# Altium PCB CATZILLA.PcbDoc (part 3 of 3)
Units mm, origin at the board's own origin, x right, y up, seen from the top; angles counter-clockwise.
Board outline 100 x 100 mm, 2 copper layers (Top Layer, Bottom Layer), stack 1.57 mm thick; 150 components, 108 nets, 585 pads, 1555 vias.
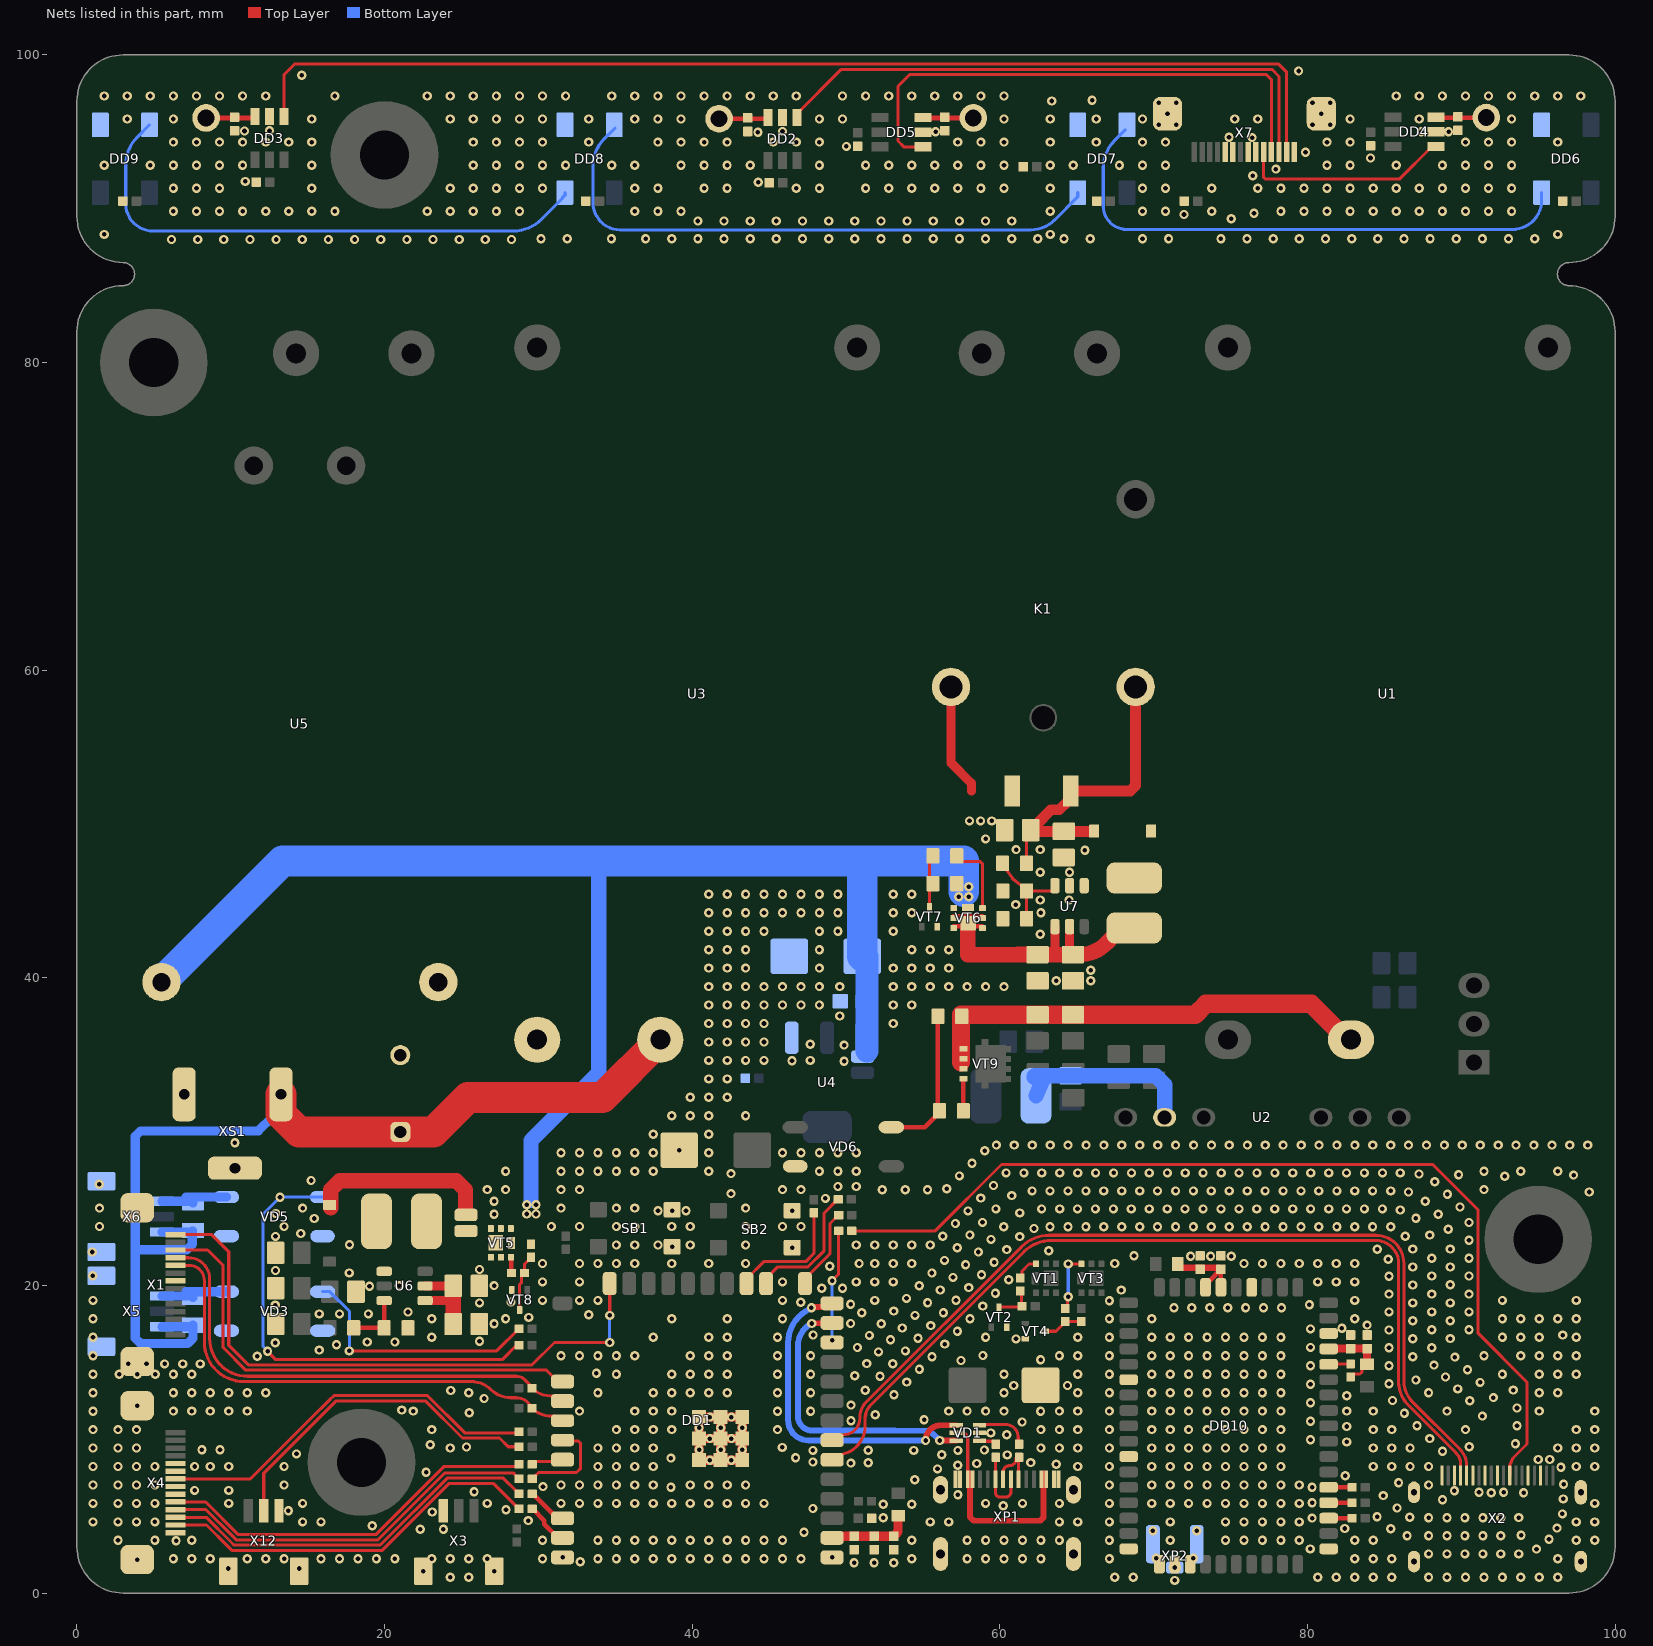
[diagram p2: the nets of this part, all layers, seen from the top]

## Via types
v1: diameter 0.6, hole 0.3, Top Layer to Bottom Layer, tented both sides, 1554 vias
v2: diameter 0.7/0.8 (per signal layer), hole 0.3, Top Layer to Bottom Layer, tented both sides, 1 vias

## Nets (pads, with @x,y where several pads share a name; then routed paths per layer and width w, separated by ;. In a path a pad name is that pad's centre, name@x,y a point inside that pad or via, vN(x,y) a via of type N, cw(c..) or ccw(c..) an arc to the next point about the centre after c; other vN are vias at no path point) (continued)
GND_ISO: C1.1 C2.1 C3.1 C4.1 C19.1 C20.1 C21.2 C22.1 C27.2 C28.2 C29.2 C30.2 C31.2 C32.2 C33.2 C34.2 C35.2 C36.2 C37.2 C38.2 C39.2 C40.2 C41.2 DD1.1 DD1.40 DD1.TP DD10.1 DD10.15 DD10.21 DD10.33 DD10.38 DD10.44 DD10.45 DD10.47 K1.1 R34.1 R35.1 R36.1 SB1.2 SB2.2 U4.1 U5.3 U7.2 VD1.2 VD3.2 VD5.2 VD6.2 VD9.2 VT2.2 VT4.2 VT7.2 VT8.2 X1.7 X1.15 X2.3 X2.5 X2.10 X2.12 X2.14 X2.17 X2.19 X2.20 X3.1 X3.MP X4.5 X4.6 X4.8 X4.9 X4.14 X4.15 X5.MP X6.MP X12.3 X12.MP XP1.1 XP1.12 XP1.MS XP2.2 XP2.3 | length 26.2
  Top Layer w0.6: v1(41.85,9.323) DD1.TP@41.85,10.043 ; v1(42.55,8.643) DD1.TP@40.45,8.643 DD1.TP@40.45,10.043 ; v1(42.55,11.443) DD1.TP@43.25,11.443 ; K1.1@56.825,58.908 56.825,53.975 58.15,52.65 58.15,52.15 ; DD1.TP@40.45,10.043 DD1.TP@40.45,11.443 DD1.TP@41.85,11.443 ; DD1.TP@40.45,10.043 DD1.TP@41.85,10.043 ; DD1.TP@41.85,10.043 DD1.TP@41.85,8.643 DD1.TP@43.25,8.643 DD1.TP@43.25,10.043 ; DD1.TP@41.85,10.043 DD1.TP@43.25,10.043 ; DD1.TP@41.85,10.043 DD1.TP@41.85,11.443 ; DD1.TP@41.85,11.443 DD1.TP@43.25,11.443 ; DD1.TP@43.25,10.043 DD1.TP@43.25,11.443
  other v1: 71.375,0.825 24.273,1.03 25.473,1.03 67.473,1.03 68.673,1.03 80.673,1.03 81.873,1.03 83.073,1.03 84.273,1.03 85.473,1.03 87.873,1.03 89.073,1.03 90.273,1.03 91.473,1.03 92.673,1.03 93.873,1.03 95.073,1.03 96.273,1.03 22.525,1.425 27.125,1.425 9.85,1.6 14.45,1.6 50.525,1.975 51.825,1.975 53.1,1.975 32.725,2.044 3.925,2.178 6.273,2.23 7.473,2.23 8.673,2.23 11.073,2.23 12.273,2.23 13.473,2.23 15.873,2.23 17.073,2.23 18.273,2.23 19.473,2.23 20.673,2.23 23.073,2.23 24.273,2.23 25.473,2.23 26.673,2.23 30.273,2.23 33.873,2.23 35.073,2.23 36.273,2.23 37.473,2.23 38.673,2.23 39.873,2.23 41.073,2.23 42.273,2.23 43.473,2.23 44.673,2.23 45.873,2.23 47.073,2.23 54.273,2.23 57.873,2.23 59.073,2.23 60.273,2.23 61.473,2.23 62.673,2.23 67.125,2.231 83.073,2.23 84.273,2.23 85.473,2.23 96.273,2.23 70.167,2.272 72.585,2.272 31.575,2.323 49.1,2.323 87.873,2.55 89.073,2.55 90.234,2.55 91.407,2.55 92.568,2.55 93.729,2.55 94.888,2.86 80.175,2.875 6.45,3.4 2.673,3.43 5.073,3.43 7.473,3.43 30.273,3.43 33.873,3.43 35.073,3.43 36.273,3.43 37.473,3.43 38.673,3.43 39.873,3.43 41.073,3.43 42.273,3.43 43.473,3.43 44.673,3.43 45.873,3.43 54.273,3.43 57.873,3.43 59.073,3.43 60.273,3.43 61.473,3.43 62.673,3.43 63.873,3.43 67.125,3.431 71.073,3.43 74.673,3.43 75.873,3.43 77.073,3.43 78.273,3.43 79.473,3.43 83.073,3.43 84.273,3.43 97.473,3.43 98.673,3.43 95.7,3.5 86.478,3.735 87.873,3.731 89.073,3.731 90.234,3.731 91.407,3.731 92.568,3.731 93.888,3.757 47.273,3.952 69.95,4.05 72.8,4.05 22.32,4.15 23.825,4.15 85.415,4.178 82.425,4.2 96.225,4.225 19.2,4.375 1.05,4.63 2.673,4.63 3.873,4.63 5.073,4.63 14.673,4.63 15.873,4.63 55.473,4.63 56.673,4.63 63.873,4.63 65.073,4.63 67.125,4.631 71.073,4.63 74.673,4.63 75.873,4.63 77.073,4.63 78.273,4.63 79.473,4.63 97.473,4.63 98.673,4.63 29.35,4.715 80.3,4.875 52.425,4.9 87.873,4.904 89.073,4.904 90.234,4.904 91.407,4.904 92.568,4.904 86.65,4.925 93.74,4.911 84.525,4.965 96.575,5.15 23.105,5.27 13.75,5.35 27.9,5.425 47.85,5.5 85.829,5.53 60.225,5.675 52.425,5.775 54.275,5.775 1.05,5.83 2.673,5.83 3.873,5.83 5.073,5.83 9.873,5.83 14.673,5.83 26.673,5.83 31.473,5.83 32.673,5.83 33.873,5.83 35.073,5.83 36.273,5.83 37.473,5.83 38.673,5.83 39.873,5.83 41.073,5.83 42.273,5.83 43.473,5.83 44.673,5.83 59.073,5.83 61.473,5.83 63.873,5.83 67.125,5.831 69.873,5.83 71.073,5.83 72.273,5.83 73.473,5.83 74.673,5.83 75.873,5.83 77.073,5.83 78.273,5.83 79.473,5.83 98.673,5.83 80.3,5.875 88.775,6.075 96.625,6.125 84.932,6.338 57.275,6.4 91.95,6.525 94.05,6.525 91.15,6.55 92.75,6.55 25.821,6.582 89.55,6.65 7.65,6.675 9.873,6.675 38.618,6.885 80.3,6.875 30.3,6.925 1.05,7.03 2.673,7.03 3.873,7.03 5.073,7.03 13.473,7.03 31.473,7.03 32.673,7.03 33.873,7.03 35.073,7.03 36.273,7.03 37.473,7.03 39.873,7.03 41.073,7.03 42.273,7.03 43.473,7.03 67.125,7.031 69.873,7.03 71.073,7.03 72.273,7.03 73.473,7.03 74.673,7.03 75.873,7.03 77.073,7.03 78.273,7.03 79.473,7.03 87.873,7.03 96.65,7.075 85.925,7.175 54.475,7.375 82.45,7.625 22.7,7.85 55.95,8.075 96.475,8.175 1.05,8.23 2.673,8.23 3.873,8.23 5.073,8.23 7.65,8.23 8.673,8.23 9.873,8.23 13.473,8.23 33.873,8.23 35.073,8.23 36.273,8.23 37.473,8.23 65.073,8.23 67.125,8.231 69.873,8.23 71.073,8.23 72.273,8.23 73.473,8.23 74.673,8.23 75.873,8.23 77.073,8.23 78.273,8.23 84.273,8.23 85.473,8.23 86.673,8.23 87.873,8.23 97.473,8.23 98.673,8.23 57.262,8.32 63.675,8.375 58.5,8.425 50.321,8.454 51.45,8.475 62.015,8.485 47.85,8.525 41.15,8.643 95,8.683 95.751,8.683 38.619,8.775 46.725,8.8 60.488,8.985 56.225,9 14.275,9.05 88.775,9.225 47.85,9.275 54.4,9.275 57.275,9.275 51.45,9.282 59,9.3 8.125,9.325 9.3,9.325 40.45,9.323 43.25,9.323 1.05,9.43 2.673,9.43 3.873,9.43 24.273,9.43 33.873,9.43 35.073,9.43 36.273,9.43 37.473,9.43 62.673,9.43 63.873,9.43 65.073,9.43 67.125,9.431 69.873,9.43 71.073,9.43 72.273,9.43 73.473,9.43 74.673,9.43 75.873,9.43 77.073,9.43 78.273,9.43 84.273,9.43 85.473,9.43 86.673,9.43 96.273,9.43 97.473,9.43 98.673,9.43 45.861,9.471 25.325,9.5 90.524,9.512 22.975,9.65 93.519,9.715 82.55,9.831 80.2,9.975 41.15,10.043 42.55,10.043 87.954,10.046 60.452,10.289 59.414,10.416 1.05,10.63 2.673,10.63 3.873,10.63 23.073,10.63 35.073,10.63 36.273,10.63 37.473,10.63 38.673,10.63 45.55,10.63 62.673,10.63 63.873,10.63 65.073,10.63 67.125,10.631 69.873,10.63 71.073,10.63 72.273,10.63 73.473,10.63 74.673,10.63 75.873,10.63 77.073,10.63 78.273,10.63 84.273,10.63 85.473,10.63 90.273,10.63 97.473,10.63 98.673,10.63 40.45,10.748 41.85,10.748 43.25,10.748 82.55,10.831 93.625,10.875 87.124,10.876 61.45,11.125 80.2,11.175 50.325,11.2 55.075,11.275 41.15,11.443 91.371,11.507 51.9,11.6 86.303,11.697 25.5,11.725 1.05,11.83 6.273,11.83 7.473,11.83 8.673,11.83 9.873,11.83 11.073,11.83 21.873,11.83 32.673,11.83 36.273,11.83 37.473,11.83 38.673,11.83 45.55,11.83 47.7,11.83 56.673,11.83 57.873,11.83 59.073,11.83 60.273,11.83 62.65,11.825 63.873,11.83 65.073,11.83 67.125,11.831 69.873,11.83 71.073,11.83 72.273,11.83 73.473,11.83 74.673,11.83 75.873,11.83 77.073,11.83 78.273,11.83 82.55,11.831 84.273,11.83 89.073,11.83 95.073,11.83 98.673,11.83 21.125,11.9 93.625,12.036 3.925,12.178 50.325,12.223 80.2,12.375 90.55,12.5 85.525,12.525 26.475,12.65 92.085,12.709 82.55,12.831 53.121,12.896 1.05,13.03 6.273,13.03 7.473,13.03 8.673,13.03 9.873,13.03 11.073,13.03 12.273,13.03 25.473,13.03 33.873,13.03 37.473,13.03 38.673,13.03 39.873,13.03 41.073,13.03 42.273,13.03 45.55,13.03 47.7,13.03 60.273,13.03 65.073,13.03 67.125,13.03 69.873,13.03 71.073,13.03 72.273,13.03 73.473,13.03 74.673,13.03 75.873,13.03 77.073,13.03 78.273,13.03 87.873,13.03 95.073,13.03 96.273,13.03 24.3,13.175 51.257,13.188 93.375,13.2 89.775,13.275 60.9,13.5 64.4,13.5 80.2,13.575 85.3,13.611 53.942,13.717 91.225,13.7 87.052,13.851 88.975,14.05 52.211,14.097 50.57,14.132 1.05,14.23 2.748,14.23 3.923,14.23 5.098,14.23 6.273,14.23 7.473,14.23 35.073,14.23 38.673,14.23 39.873,14.23 41.073,14.23 42.273,14.23 45.55,14.23 47.7,14.23 60.273,14.23 65.073,14.23 67.125,14.23 69.873,14.23 71.073,14.23 72.273,14.23 73.473,14.23 74.673,14.23 75.873,14.23 77.073,14.23 78.273,14.23 92.673,14.23 95.073,14.23 96.273,14.23 97.473,14.23 33.775,14.3 90.404,14.521 54.772,14.547 80.2,14.774 85.3,14.784 88.225,14.825 3.35,14.9 4.525,14.9 5.7,14.9 6.875,14.9 8.025,14.9 51.347,14.92 53.033,14.918 57.475,15.125 62.65,15.175 89.583,15.342 55.593,15.368 86.85,15.373 11.725,15.4 1.05,15.43 31.473,15.43 32.673,15.43 33.873,15.43 35.073,15.43 36.273,15.43 39.873,15.43 41.073,15.43 42.273,15.43 45.55,15.43 47.7,15.43 63.873,15.43 65.073,15.43 67.125,15.43 69.873,15.43 71.073,15.43 72.273,15.43 73.473,15.43 74.673,15.43 75.873,15.43 77.073,15.43 78.273,15.43 91.473,15.43 93.873,15.43 95.073,15.43 96.273,15.43 97.473,15.43 58.9,15.45 52.116,15.682 53.862,15.747 15.75,15.8 85.3,15.945 88.075,15.945 50.743,15.964 80.2,15.974 16.875,16.15 56.414,16.189 12.9,16.275 18.875,16.325 20.675,16.325 26.175,16.381 52.893,16.47 61.05,16.525 86.85,16.534 89.275,16.546 54.683,16.568 1.05,16.63 23.073,16.63 37.473,16.63 41.073,16.63 42.273,16.63 45.55,16.63 59.073,16.63 65.073,16.63 67.125,16.63 69.873,16.63 71.073,16.63 72.273,16.63 73.473,16.63 74.673,16.63 75.873,16.63 77.073,16.63 78.273,16.63 92.673,16.63 93.873,16.63 95.073,16.63 97.473,16.63 51.52,16.752 47.863,16.781 96.6,16.775 57.243,17.018 85.3,17.106 88.075,17.118 90.5,17.118 80.2,17.174 82.237,17.221 53.663,17.233 55.504,17.389 83.875,17.425 27.125,17.506 50.3,17.525 52.29,17.515 86.85,17.707 89.275,17.708 1.05,17.83 23.073,17.83 27.873,17.83 38.673,17.83 42.273,17.83 45.873,17.83 67.125,17.83 69.873,17.83 83.073,17.83 92.673,17.83 93.873,17.83 95.073,17.83 96.273,17.83 97.473,17.83 58.064,17.839 29.375,17.925 54.484,18.054 33.275,18.1 15.75,18.15 17.075,18.15 18.95,18.15 51.025,18.225 56.334,18.219 21.527,18.275 85.3,18.279 88.075,18.28 90.5,18.28 53.111,18.336 71.321,18.55 72.482,18.55 73.643,18.55 74.816,18.55 75.978,18.55 77.139,18.55 78.312,18.55 58.885,18.66 12.9,18.725 80.125,18.75 50.3,18.775 26.175,18.865 55.305,18.875 86.85,18.868 89.275,18.869 28.225,18.925 47.065,18.915 67.125,19 1.05,19.03 30.273,19.03 32.673,19.03 33.873,19.03 45.873,19.03 51.873,19.03 57.155,19.04 83.073,19.03 92.673,19.03 97.473,19.03 53.932,19.157 85.3,19.44 88.075,19.441 90.5,19.441 59.715,19.49 56.134,19.704 67.9,19.7 48.425,19.825 49.775,19.825 57.976,19.861 19.025,19.95 20.95,19.975 27.125,19.99 54.761,19.986 86.85,20.03 89.275,20.042 30.273,20.23 32.673,20.23 45.873,20.23 50.673,20.23 51.873,20.23 53.073,20.23 80.673,20.23 81.873,20.23 83.073,20.23 60.575,20.375 56.955,20.525 85.3,20.602 1.025,20.625 88.075,20.614 90.5,20.614 58.805,20.691 17.7,20.815 55.582,20.807 12.909,20.975 26.175,21.04 86.85,21.203 89.275,21.203 48.95,21.25 57.776,21.346 30.273,21.43 32.673,21.43 33.873,21.43 35.073,21.43 36.273,21.43 38.673,21.43 41.075,21.43 43.473,21.43 50.85,21.43 51.873,21.43 53.073,21.43 54.273,21.43 67.473,21.43 75.873,21.43 77.073,21.43 78.273,21.43 79.473,21.43 80.673,21.43 81.873,21.43 83.073,21.43 59.626,21.512 56.403,21.628 85.25,21.7 88.075,21.775 90.5,21.775 72.4,21.9 73.7,21.9 75.05,21.9 68.725,21.939 1,22.175 58.606,22.176 63.175,22.25 60.448,22.333 84.54,22.353 86.85,22.364 89.275,22.364 46.5,22.461 57.233,22.458 38.7,22.523 35.073,22.63 36.273,22.63 37.775,22.63 39.873,22.63 43.473,22.63 50.673,22.63 51.873,22.63 53.073,22.63 54.273,22.63 55.473,22.63 17.725,22.64 90.5,22.936 59.427,22.997 12.909,23.192 61.3,23.175 56.293,23.206 86.35,23.2 58.054,23.279 87.95,23.275 14.55,23.375 89.15,23.65 62.225,23.7 60.248,23.818 63.261,23.812 64.435,23.812 65.596,23.812 66.757,23.812 67.93,23.812 69.091,23.812 70.252,23.812 71.425,23.812 72.587,23.812 73.748,23.812 74.921,23.812 76.082,23.812 77.243,23.812 78.416,23.812 79.578,23.812 80.739,23.812 81.912,23.812 83.073,23.812 84.234,23.812 85.407,23.812 1.473,23.83 13.473,23.83 30.85,23.83 32.673,23.83 35.073,23.83 36.273,23.83 38.673,23.83 39.873,23.83 43.473,23.83 45.873,23.83 47.073,23.83 57.114,24.027 58.875,24.1 90.5,24.097 15.425,24.35 87.05,24.375 27.125,24.625 88.5,24.625 12.925,24.675 61.299,24.715 37.775,24.862 38.7,24.862 39.6,24.862 46.5,24.861 57.935,24.848 86.035,24.903 59.746,24.978 62.716,24.978 63.889,24.978 65.05,24.978 66.211,24.978 67.384,24.978 68.546,24.978 69.719,24.978 70.88,24.978 72.041,24.978 73.214,24.978 74.375,24.978 75.549,24.978 76.71,24.978 77.871,24.978 79.044,24.978 80.205,24.978 81.378,24.978 82.54,24.978 83.701,24.978 84.874,24.978 1.473,25.03 14.673,25.03 31.473,25.03 35.073,25.03 36.273,25.03 43.473,25.03 89.92,25.102 27.125,25.475 87.65,25.475 48.659,25.662 58.764,25.678 60.781,25.843 89.099,25.923 42.525,25.975 86.568,26.075 98.325,26.075 62.1,26.146 63.261,26.146 64.435,26.146 65.596,26.146 66.757,26.146 67.93,26.146 69.091,26.146 70.252,26.146 71.425,26.146 72.587,26.146 73.748,26.146 74.921,26.146 76.082,26.146 77.243,26.146 78.416,26.146 79.578,26.146 80.739,26.146 81.912,26.146 83.073,26.146 84.234,26.146 85.407,26.146 26.673,26.23 27.873,26.23 31.473,26.23 32.673,26.23 45.873,26.23 47.073,26.23 52.35,26.225 53.85,26.225 55.3,26.225 91.473,26.23 56.543,26.293 49.473,26.432 50.673,26.433 59.585,26.499 1.448,26.58 88.278,26.744 15.225,26.825 92.825,27.1 57.372,27.122 97.3,27.175 89.825,27.2 87.248,27.249 42.525,27.275 60.406,27.32 61.568,27.32 62.729,27.32 63.902,27.32 65.063,27.32 66.224,27.32 67.397,27.32 68.559,27.32 69.72,27.32 70.893,27.32 72.054,27.32 73.215,27.32 74.388,27.32 75.549,27.32 76.711,27.32 77.884,27.32 79.045,27.32 80.206,27.32 81.379,27.32 82.54,27.32 83.702,27.32 84.875,27.32 86.035,27.32 27.873,27.43 31.473,27.43 32.673,27.43 33.873,27.43 35.073,27.43 36.273,27.43 37.473,27.43 41.073,27.43 48.273,27.43 49.473,27.43 50.673,27.43 91.473,27.43 93.873,27.43 96.273,27.43 58.193,27.943 31.473,28.63 32.673,28.63 33.873,28.63 35.073,28.63 36.273,28.63 37.473,28.63 41.073,28.63 45.873,28.63 47.073,28.63 48.273,28.63 49.473,28.63 50.673,28.63 59.014,28.764 39.15,28.797 59.778,29.125 60.939,29.125 62.112,29.125 63.273,29.125 64.434,29.125 65.607,29.125 66.769,29.125 67.93,29.125 69.103,29.125 70.264,29.125 71.425,29.125 72.598,29.125 73.759,29.125 74.921,29.125 76.094,29.125 77.255,29.125 78.416,29.125 79.589,29.125 80.75,29.125 81.912,29.125 83.085,29.125 84.246,29.125 85.407,29.125 86.568,29.125 87.741,29.125 88.902,29.125 90.064,29.125 91.237,29.125 92.398,29.125 93.559,29.125 94.72,29.125 95.893,29.125 97.055,29.125 98.216,29.125 37.473,29.83 41.073,29.83 38.673,31.03 39.873,31.03 41.073,31.03 43.473,31.03 39.873,32.23 41.073,32.23 42.273,32.23 41.073,33.43 42.273,33.43 49.875,34.575 46.491,34.614 41.073,34.63 42.273,34.63 43.473,34.63 44.673,34.63 47.675,34.63 49.875,35.625 47.675,35.675 41.073,35.83 42.273,35.83 43.473,35.83 44.673,35.83 41.073,37.03 42.273,37.03 43.473,37.03 44.673,37.03 53.073,37.03 49.593,37.52 41.073,38.23 42.273,38.23 43.473,38.23 44.673,38.23 45.873,38.23 47.073,38.23 48.273,38.23 53.073,38.23 54.273,38.23 41.073,39.43 42.273,39.43 43.473,39.43 44.673,39.43 45.873,39.43 47.073,39.43 48.273,39.43 49.593,39.43 53.073,39.43 54.273,39.43 55.473,39.43 56.673,39.43 57.873,39.43 59.073,39.43 60.273,39.43 63.669,39.812 65.905,39.812 65.905,40.487 41.073,40.63 42.273,40.63 43.473,40.63 48.273,40.63 53.073,40.63 54.273,40.63 55.473,40.63 56.673,40.63 41.073,41.83 42.273,41.83 43.473,41.83 48.273,41.83 54.273,41.83 55.473,41.83 56.673,41.83 62.63,42.837 41.073,43.03 42.273,43.03 43.473,43.03 44.673,43.03 48.273,43.03 49.473,43.03 53.073,43.03 41.073,44.23 42.273,44.23 43.473,44.23 44.673,44.23 45.873,44.23 47.073,44.23 48.273,44.23 49.473,44.23 53.073,44.23 54.273,44.23 62.673,44.23 61.03,44.762 62.63,45.062 64.505,45.062 41.073,45.43 42.273,45.43 43.473,45.43 44.673,45.43 45.873,45.43 47.073,45.43 48.273,45.43 49.473,45.43 53.073,45.43 54.273,45.43 62.63,46.862 64.53,46.862 65.53,48.287 61.055,48.337 62.63,48.337 59.073,49.03 58.025,50.2 58.75,50.2 59.475,50.2
GND_SENS: C5.2 C6.2 C7.2 C8.2 C9.2 C10.2 C11.2 C12.2 C13.1 C14.1 C15.2 C16.2 C17.2 C18.2 DD2.2 DD3.2 DD4.2 DD5.2 DD6.3 DD7.3 DD8.3 DD9.3 X7.1 X7.6 X7.7 X7.9 X7.10 X7.15
  other v1: 6.153,88.002 7.853,88.002 9.553,88.002 11.253,88.002 12.953,88.002 14.653,88.002 16.353,88.002 18.053,88.002 19.753,88.002 21.453,88.002 23.153,88.002 24.853,88.002 26.553,88.002 28.253,88.002 30.172,88.05 31.872,88.05 34.75,88.05 36.972,88.05 38.672,88.05 40.372,88.05 42.072,88.05 43.772,88.05 45.472,88.05 47.172,88.05 48.872,88.05 50.572,88.05 52.272,88.05 53.972,88.05 55.672,88.05 57.372,88.05 59.072,88.05 60.772,88.05 62.472,88.05 64.172,88.05 65.872,88.05 69.272,88.05 70.972,88.05 74.372,88.05 76.072,88.05 77.772,88.05 79.472,88.05 81.172,88.05 82.872,88.05 84.572,88.05 86.272,88.05 87.972,88.05 89.672,88.05 91.372,88.05 93.072,88.05 94.772,88.05 1.772,88.33 63.272,88.33 96.272,88.33 40.372,89.2 42.072,89.2 43.772,89.2 45.472,89.2 47.172,89.2 48.872,89.2 50.572,89.2 52.272,89.2 53.972,89.2 55.672,89.2 57.372,89.2 59.072,89.2 60.772,89.2 75.05,89.35 71.975,89.625 76.525,89.7 6.272,89.83 7.772,89.83 9.272,89.83 10.772,89.83 12.272,89.83 13.772,89.83 15.272,89.83 16.772,89.83 22.772,89.83 24.272,89.83 25.772,89.83 27.272,89.83 28.772,89.83 36.272,89.83 37.772,89.83 39.272,89.83 63.272,89.83 69.272,89.83 70.772,89.83 73.772,89.83 78.272,89.83 79.772,89.83 81.272,89.83 82.772,89.83 84.272,89.83 85.772,89.83 87.272,89.83 88.772,89.83 90.272,89.83 91.772,89.83 93.272,89.83 6.272,91.33 7.772,91.33 9.272,91.33 15.272,91.33 24.272,91.33 25.772,91.33 27.272,91.33 28.772,91.33 30.272,91.33 36.272,91.33 37.772,91.33 40.772,91.33 42.272,91.33 46.772,91.33 48.272,91.33 51.272,91.33 52.772,91.33 54.272,91.33 55.772,91.33 57.272,91.33 58.772,91.33 60.272,91.33 63.272,91.33 69.272,91.33 70.772,91.33 73.772,91.33 76.772,91.33 78.272,91.33 79.772,91.33 81.272,91.33 82.772,91.33 84.272,91.33 85.772,91.33 87.272,91.33 88.772,91.33 90.272,91.33 91.772,91.33 93.272,91.33 44.294,91.725 10.944,91.775 76.45,92.15 77.95,92.575 1.772,92.83 4.772,92.83 6.272,92.83 7.772,92.83 9.272,92.83 10.772,92.83 15.272,92.83 25.772,92.83 27.272,92.83 28.772,92.83 30.272,92.83 31.772,92.83 34.772,92.83 36.272,92.83 39.272,92.83 40.772,92.83 42.272,92.83 43.772,92.83 48.272,92.83 51.272,92.83 52.772,92.83 54.272,92.83 55.772,92.83 57.272,92.83 58.772,92.83 60.272,92.83 63.272,92.83 64.772,92.83 67.772,92.83 69.272,92.83 70.772,92.83 81.272,92.83 82.772,92.83 85.772,92.83 88.772,92.83 90.272,92.83 91.772,92.83 93.272,92.83 84.1,93.3 79.875,93.675 50.025,94.05 6.272,94.33 7.772,94.33 9.272,94.33 10.772,94.33 12.272,94.33 13.772,94.33 15.272,94.33 25.772,94.33 27.272,94.33 28.772,94.33 30.272,94.33 33.272,94.33 37.772,94.33 39.272,94.33 40.772,94.33 42.272,94.33 45.272,94.33 46.772,94.33 48.272,94.33 57.272,94.33 58.772,94.33 60.272,94.33 63.272,94.33 66.272,94.33 69.272,94.33 70.772,94.33 81.272,94.33 82.772,94.33 90.272,94.33 91.772,94.33 93.272,94.33 96.272,94.33 76.4,94.625 74.9,94.65 44.275,94.975 55.825,95 87.4,95 89.175,95 45.869,95.025 10.9,95.05 12.519,95.075 70.325,95.45 71.475,95.45 80.325,95.45 81.475,95.45 3.272,95.83 6.272,95.83 15.272,95.83 24.272,95.83 25.772,95.83 27.272,95.83 28.772,95.83 30.272,95.83 33.272,95.83 36.272,95.83 37.772,95.83 39.272,95.83 48.272,95.83 49.772,95.83 60.272,95.83 63.272,95.83 66.272,95.83 69.272,95.83 75.272,95.83 76.772,95.83 82.772,95.83 87.272,95.83 93.272,95.83 70.9,96.175 80.9,96.175 70.325,96.9 71.475,96.9 80.325,96.9 81.475,96.9 63.375,97 66,97.05 1.772,97.33 3.272,97.33 4.772,97.33 6.272,97.33 7.772,97.33 9.272,97.33 10.772,97.33 12.272,97.33 16.772,97.33 22.772,97.33 24.272,97.33 25.772,97.33 27.272,97.33 28.772,97.33 30.272,97.33 31.772,97.33 34.772,97.33 36.272,97.33 37.772,97.33 39.272,97.33 40.772,97.33 42.272,97.33 43.772,97.33 45.272,97.33 46.772,97.33 49.772,97.33 51.272,97.33 52.772,97.33 54.272,97.33 55.772,97.33 57.272,97.33 58.772,97.33 60.272,97.33 85.772,97.33 87.272,97.33 88.772,97.33 90.272,97.33 91.772,97.33 93.272,97.33 94.772,97.33 96.272,97.33 97.772,97.33 14.625,98.675 79.425,98.95
LCD_CS: DD1.25 X1.1 | length 39.7
  Top Layer w0.2: X1.1@6.425,23.302 8.773,23.302 9.875,22.2 9.875,16.109 11.147,14.837 12.574,14.837 12.577,14.84 13.869,14.84 13.872,14.837 29.587,14.837 31.045,16.295 v1(34.635,16.295) ; DD1.25@34.635,20.123 34.639,20.119 34.639,18.059 v1(34.643,18.055)
  Bottom Layer w0.2: v1(34.635,16.295) 34.639,16.299 34.639,18.051 v1(34.643,18.055)
LCD_GND: C26.2 U3.3 VD3.3 VD5.3 XS1.2 XS1.3
  other v1: 10.275,29.275
LCD_RS: DD1.31 X1.3 | length 31.8
  Top Layer w0.2: X1.3@6.425,22.302 8.498,22.302 9.507,21.293 9.507,15.968 10.978,14.497 30.531,14.497 31.275,13.753 DD1.31@31.575,13.753
LCD_SCL: DD1.32 R1.1 X1.4 | length 31.2
  Top Layer w0.2: X1.4@6.425,21.802 7.257,21.802 cw(c7.257,20.425) 8.634,20.425 8.634,16.548 ccw(c11.082,16.548) 11.082,14.1 28.575,14.1 cw(c28.575,13.325) 29.123,13.873 R1.1@29.627,13.37 ; R1.1@29.583,13.326 ccw(c30.791,14.534) 30.791,12.826 DD1.32@31.15,12.826
LCD_SDA: DD1.33 R2.1 X1.5 | length 31.4
  Top Layer w0.2: X1.5@6.425,21.302 7.311,21.302 cw(c7.311,20.325) 8.288,20.325 8.288,16.315 ccw(c10.853,16.315) 10.853,13.75 25.658,13.75 cw(c25.658,11.958) 26.925,13.225 ccw(c28.192,14.492) 28.192,12.7 28.568,12.7 cw(c28.568,11.643) 29.316,12.391 R2.1@29.644,12.062 ; R2.1@29.583,12.026 ccw(c30.843,13.287) 30.843,11.504 DD1.33@31.07,11.504
NetC2_2: C2.2 C3.2 C4.2 DD1.2 FB1.1 | length 5.5
  Top Layer w0.6: DD1.2@49.1,3.593 49.208,3.701 C4.2@50.531,3.701 ; C4.2@50.532,3.7 C3.2@51.831,3.7 C2.2@53.099,3.7 ; C2.2@53.106,3.7 53.31,3.904 53.31,3.924 53.378,3.992 FB1.1@53.378,5.017
NetC5_1: C5.1 DD2.3 SN1.1 | length 3.2
  Top Layer w0.3: SN1.1@41.75,95.85 44.837,95.85 DD2.3@44.921,95.934
NetC6_1: C6.1 DD3.3 SN2.1 | length 3.2
  Top Layer w0.3: SN2.1@8.4,95.9 11.487,95.9 DD3.3@11.571,95.984
NetC9_1: C9.1 DD4.3 SN3.1 | length 3.2
  Top Layer w0.3: DD4.3@88.454,96.009 88.538,95.925 SN3.1@91.625,95.925
NetC10_1: C10.1 DD5.3 SN4.1 | length 3.2
  Top Layer w0.3: DD5.3@55.104,95.984 55.188,95.9 SN4.1@58.275,95.9
NetC19_2: C19.2 C20.2 DD10.14 FB2.2 R25.1 | length 5
  Top Layer w0.2: R25.1@82.8,14.05 82.8,14.071 82.975,14.246 83.421,14.246 83.538,14.363 83.538,14.6 83.813,14.875 FB2.2@83.875,14.875
  Top Layer w0.5: DD10.14@81.426,15.904 C20.2@83.871,15.904 ; FB2.2@83.875,14.875 C20.2@83.875,15.825
NetC21_1: C21.1 C22.2 DD10.23 DD10.24 FB3.2 | length 5.9
  Top Layer w0.3: DD10.24@73.375,19.875 73.375,20.111 73.573,20.31 73.636,20.31 C21.1@74.375,21.049 DD10.23@74.375,19.875
  Top Layer w0.4: FB3.2@71.575,21.4 71.575,21.156 74.268,21.156 C21.1@74.375,21.049
NetC23_1: C23.1 C50.1 R37.2 U1.4 VT9.1 VT9.2 VT9.3 | length 29.7
  Top Layer w1.2: 57.475,34.524 57.475,37.6 C23.1@62.456,37.6 C50.1@64.756,37.6 72.7,37.6 73.4,38.3 80.25,38.3 82.575,35.975 U1.4@82.825,35.975
NetC32_1: C32.1 C33.1 L2.1 U6.4 U6.5 VT5.D X11.2 | length 6.1
  Top Layer w0.6: U6.4@22.635,19.017 24.463,19.017 24.463,19.015 ; U6.5@22.637,19.965 C33.1@24.454,19.965
  Top Layer w1: C32.1@24.463,17.489 24.463,19.015 C33.1@24.463,19.973
NetC37_1: C37.1 C39.1 K1.2 R28.2 VD7.1 VD9.1 | length 20.5
  Top Layer w0.2: R28.2@61.733,47.442 C37.1@61.733,49.489
  Top Layer w0.7: C37.1@62.011,49.6 62.011,49.75 62.236,49.975 62.386,49.975 63.331,50.92 63.869,50.92 VD9.1@64.449,51.501 ; C37.1@62.091,49.52 C39.1@64.161,49.52 VD7.1@66.105,49.52 ; VD9.1@64.749,52.25 64.749,52.35 64.599,52.2 VD9.1@64.599,52.151 68.476,52.151 68.825,52.5 K1.2@68.825,58.908
NetC40_1: C40.1 C41.1 L1.1 U7.4 U7.5 VT6.D | length 21.4
  Top Layer w0.3: VT6.D@56.987,43.356 VT6.D@58.863,43.356 ; VT6.D@56.988,44.006 VT6.D@58.862,44.006
  Top Layer w0.6: U7.4@63.585,43.332 63.585,41.524 63.605,41.504 ; U7.5@64.535,43.332 64.535,41.51 C41.1@64.542,41.504
  Top Layer w1: VT6.D@57.925,43.681 57.925,41.504 60.575,41.504 ; 61.156,41.504 60.575,41.504 ; 61.156,41.525 62.435,41.525 C40.1@62.456,41.504 ; L1.1@67.417,42.739 66.926,42.248 cw(c65.13,44.044) 65.13,41.504 60.575,41.504
NetC48_1: C48.1 L3.1 U2.2 | length 12
  Bottom Layer w1: L3.1@62.222,33.522 cw(c62.34,33.522) 62.34,33.64 C48.1@64.599,33.64 70.129,33.64 70.715,33.054 U2.2@70.715,30.925 ; L3.1@62.348,32.325 L3.1@62.755,33.301
NetDD1_12: DD1.12 R9.1 | length 7.3
  Top Layer w0.2: v1(49.095,20.314) 49.526,20.745 R9.1@49.526,23.55
  Bottom Layer w0.2: v1@49.079,16.463 49.095,16.479 49.095,20.298 v1@49.111,20.314
  other v1: 49.095,16.434
NetDD1_15: DD1.15 R10.2 | length 5.4
  Top Layer w0.2: DD1.15@47.334,20.123 47.334,20.434 48.956,22.056 48.956,24.03 49.501,24.575 R10.2@49.526,24.575
NetDD1_17: DD1.17 R11.2 | length 8.6
  Top Layer w0.2: DD1.17@44.804,20.123 44.804,20.446 45.567,21.208 47.527,21.208 48.58,22.262 48.58,24.711 49.469,25.6 R11.2@49.494,25.6
NetDD1_18: DD1.18 R14.1 | length 7.7
  Top Layer w0.2: DD1.18@43.534,20.423 44.659,21.548 47.386,21.548 47.913,22.075 R14.1@47.913,24.725
NetDD6_2: DD6.2 DD7.4 | length 36.4
  Bottom Layer w0.2: DD7.4@68.152,95.126 67.469,94.443 ccw(c69.265,92.647) 66.725,92.647 66.725,90.175 ccw(c68.248,90.175) 68.248,88.652 93.327,88.652 ccw(c93.327,90.55) 95.225,90.55 DD6.2@95.225,91.05
NetDD7_2: DD7.2 DD8.4 | length 38.9
  Bottom Layer w0.2: DD8.4@34.991,95.25 34.294,94.554 ccw(c36.09,92.758) 33.55,92.758 33.55,90.4 ccw(c35.325,90.4) 35.325,88.625 62.011,88.625 ccw(c62.011,90.824) 63.566,89.269 DD7.2@65.072,90.775 ; DD7.2@65.066,90.775 DD7.2@65.066,91.05
NetDD8_2: DD8.2 DD9.4 | length 36.3
  Bottom Layer w0.2: DD9.4@4.725,95.45 3.919,94.644 ccw(c5.715,92.848) 3.175,92.848 3.175,90.325 ccw(c4.952,90.325) 4.952,88.548 28.377,88.548 ccw(c28.377,91.088) 29.392,88.759 ccw(c28.377,91.088) 30.173,89.292 DD8.2@31.602,90.721 ; DD8.2@31.577,90.746 DD8.2@31.772,90.941 ; DD8.2@31.733,90.941 DD8.2@31.733,91.05
NetDD10_3: DD10.3 R22.1 | length 1.5
  Top Layer w0.282: DD10.3@81.375,4.875 R22.1@82.9,4.875
NetDD10_4: DD10.4 R23.1 | length 1.5
  Top Layer w0.282: DD10.4@81.375,5.875 R23.1@82.9,5.875
NetDD10_5: DD10.5 R24.1 | length 1.5
  Top Layer w0.282: DD10.5@81.375,6.875 R24.1@82.9,6.875
NetDD10_13: DD10.13 R25.2 | length 1.4
  Top Layer w0.2: DD10.13@81.375,14.875 cw(c81.435,14.815) 81.435,14.9 R25.2@82.8,14.9
NetDD10_46: DD10.46 XP2.1
  other v2: 71.376,1.665
NetL1_2: L1.2 U7.1 VD7.2
NetL2_2: L2.2 U6.1 VD8.2 X11.1 | length 11.9
  Top Layer w1: VD8.2@16.501,25.062 16.501,26.214 17.086,26.8 24.68,26.8 25.265,26.214 X11.1@25.265,24.69
NetR3_1: R3.1 R4.1 VT2.3 | length 2.6
  Top Layer w0.2: VT2.3@59.95,18.575 59.988,18.613 61.462,18.613 61.5,18.65 61.413,18.737 61.413,19.553 R4.1@61.326,19.64
NetR4_2: R4.2 VT1.G | length 1.6
  Top Layer w0.2: R4.2@61.326,20.49 61.449,20.613 61.449,20.942 61.902,21.395 VT1.G@62.35,21.395
NetR5_2: R5.2 X12.2 | length 22.2
  Top Layer w0.2: X12.2@12.147,5.357 12.147,7.8 15.786,11.439 16.857,12.496 22.654,12.496 25.069,10.08 27.47,10.08 28.035,9.515 R5.2@28.75,9.515
NetR7_1: R7.1 XP1.6 XP1.8 | length 4.4
  Top Layer w0.2: R7.1@59.716,8.801 59.716,6.534 ccw(c60,6.534) 60,6.25 60.402,6.25 ; 60.402,6.248 ccw(c60.402,6.562) 60.438,6.25 ccw(c60.402,6.562) 60.716,6.562 XP1.6@60.716,7.394
NetR7_2: R7.2 VD1.1 | length 1.2
  Top Layer w0.2: VD1.1@58.615,9.917 58.66,9.872 59.507,9.872 59.691,9.689 R7.2@59.691,9.664
NetR8_1: R8.1 XP1.5 XP1.7 | length 3.1
  Top Layer w0.2: XP1.7@60.216,7.88 cw(c60.62,7.88) 60.62,8.284 ccw(c60.62,8.723) 61.059,8.723 R8.1@61.059,8.825 ; XP1.5@61.191,7.403 XP1.5@61.2,7.394 ; R8.1@61.2,8.825 61.216,8.825 XP1.5@61.216,7.194
NetR8_2: R8.2 VD1.3 | length 3.5
  Top Layer w0.2: VD1.3@58.615,10.917 58.665,10.967 VD1.3@59.057,10.967 ; VD1.3@59.057,10.967 60.358,10.967 cw(c60.358,10.125) 61.2,10.125 R8.2@61.2,9.675
NetR15_1: R15.1 X4.11 | length 25.1
  Top Layer w0.2: X4.11@6.425,5.428 8.391,5.428 10.129,3.69 10.359,3.46 19.57,3.46 23.927,7.817 28.358,7.817 28.55,7.625 28.55,7.6 28.725,7.425 R15.1@28.75,7.425
NetR16_1: R16.1 X4.10 | length 25.1
  Top Layer w0.2: X4.10@6.425,5.928 8.372,5.928 10.5,3.8 19.429,3.8 23.848,8.219 28.594,8.219 R16.1@28.75,8.375
NetR17_1: R17.1 X4.12 | length 25.3
  Top Layer w0.2: X4.12@6.425,4.928 8.41,4.928 9.988,3.35 10.218,3.12 19.711,3.12 24.068,7.477 27.723,7.477 28.55,6.65 28.55,6.625 28.725,6.45 R17.1@28.75,6.45
NetR18_1: R18.1 X4.13 | length 25.5
  Top Layer w0.2: X4.13@6.425,4.428 8.429,4.428 9.848,3.01 10.078,2.78 19.852,2.78 24.208,7.137 27.063,7.137 28.725,5.475 R18.1@28.75,5.475
NetR19_2: R19.2 VD3.1 | length 16.5
  Top Layer w0.2: v1(17.708,15.748) 27.29,15.748 28.717,17.175 R19.2@28.725,17.175
  Bottom Layer w0.2: VD3.1@15.974,19.595 16.448,19.595 17.725,18.318 17.725,15.765 v1(17.708,15.748)
NetR20_1: R20.1 X4.7 | length 25.6
  Top Layer w0.2: X4.7@6.425,7.428 11.289,7.428 15.186,11.325 16.462,12.602 16.658,12.783 16.716,12.836 22.795,12.836 25.21,10.42 28.68,10.42 R20.1@28.75,10.49
NetR21_2: R21.2 VD5.1 | length 30.3
  Top Layer w0.2: v1@12.4,15.815 12.4,15.7 12.92,15.18 14.01,15.18 14.013,15.177 27.644,15.177 R21.2@28.592,16.125
  Bottom Layer w0.2: v1(12.4,15.725) 12.4,15.737 12.094,16.042 12.094,24.625 v1(13.206,25.737) 13.21,25.741 15.97,25.741 VD5.1@15.974,25.745
NetR26_2: R26.2 R27.1 VT4.3 | length 2.6
  Top Layer w0.2: VT4.3@62.95,17.025 63.649,17.025 64.25,17.625 R27.1@64.25,17.65 R26.2@65.3,17.65
NetR27_2: R27.2 VT3.G | length 3.9
  Top Layer w0.2: R27.2@64.25,18.5 64.413,18.663 64.413,19.229 v1(64.452,19.267) ; v1@64.425,21.375 v1(64.45,21.4) VT3.G@65.3,21.4
  Bottom Layer w0.2: v1(64.45,21.4) v1(64.45,21.4) 64.451,19.268 v1(64.452,19.267)
NetR30_1: R30.1 R31.1 VT7.3 | length 3.4
  Top Layer w0.2: VT7.3@55.425,44.625 55.425,47.7 R30.1@55.65,47.926
NetR30_2: R30.2 VT6.G | length 4.7
  Top Layer w0.2: R30.2@57.2,47.926 57.2,47.875 57.525,47.55 58.737,47.55 58.862,47.425 VT6.G@58.862,44.656
NetR32_1: R32.1 R33.1 VT8.3 | length 3.7
  Top Layer w0.2: VT8.3@28.78,18.41 28.78,20.056 28.891,20.167 28.891,20.517 28.898,20.525 28.898,20.635 29.073,20.81 R33.1@29.123,20.81 ; R33.1@29.098,20.935 29.098,21.387 29.521,21.81 R32.1@29.521,21.835
  Top Layer w0.3: R32.1@29.525,21.685 R32.1@29.525,21.7
NetR33_2: R33.2 VT5.G | length 1
  Top Layer w0.3: VT5.G@28.217,21.828 28.232,21.812 28.232,20.825 R33.2@28.248,20.81
NetR37_1: R37.1 R38.2 VD6.4 | length 9.8
  Top Layer w0.3: VD6.4@52.95,30.286 55.123,30.286 55.8,30.963 55.8,31.075 R38.2@56.075,31.35 ; R38.2@55.975,31.35 R37.1@55.975,37.5
NetR38_1: R38.1 VT9.4 | length 2.1
  Top Layer w0.3: R38.1@57.625,31.35 57.625,33.433 VT9.4@57.642,33.433
NetVD2_2: VD2.2 VD3.4 X5.3 | length 5.5
  Bottom Layer w0.6: X5.3@5.527,19.322 VD2.2@7.549,19.322 ; VD2.2@7.549,19.225 VD2.2@7.549,19.322 ; VD3.4@9.724,19.595 7.101,19.595 7.101,19.568 7.549,19.568 VD2.2@7.549,19.322
NetVD4_2: VD4.2 VD5.4 X6.3 | length 5.5
  Bottom Layer w0.6: X6.3@5.527,25.472 VD4.2@7.549,25.472 ; VD4.2@7.549,25.375 VD4.2@7.549,25.472 ; VD5.4@9.724,25.745 7.101,25.745 7.101,25.718 7.549,25.718 VD4.2@7.549,25.472
SCL_ISO: DD1.6 X2.16 | length 59.1
  Top Layer w0.2: DD1.6@49.434,9.005 ccw(c49.434,10.76) 50.675,9.519 ccw(c49.311,10.883) 51.24,10.883 51.24,11.317 cw(c52.558,11.317) 51.626,12.249 61.558,22.181 cw(c63.354,20.384) 63.354,22.924 84.442,22.924 cw(c84.442,21.443) 85.49,22.491 cw(c84.442,21.443) 85.924,21.443 85.924,13.719 ccw(c87.994,13.719) 86.53,12.255 89.641,9.144 cw(c89.499,9.003) 89.655,9.128 89.805,8.941 cw(c89.648,8.816) 89.817,8.923 cw(c88.755,8.255) 89.82,8.919 cw(c88.985,8.435) 89.822,8.916 cw(c88.985,8.435) 89.95,8.435 X2.16@89.95,7.65
SDA_ISO: DD1.7 X2.15 | length 58.8
  Top Layer w0.2: DD1.7@49.544,10.287 49.811,10.287 ccw(c49.811,11.376) 50.9,11.376 50.9,11.405 cw(c52.345,11.405) 51.323,12.427 61.417,22.521 cw(c63.213,20.724) 63.213,23.264 84.442,23.264 cw(c84.442,21.443) 85.73,22.731 cw(c84.442,21.443) 86.264,21.443 86.264,13.79 ccw(c88.165,13.79) 86.82,12.445 89.883,9.383 cw(c88.755,8.255) 90.35,8.255 X2.15@90.35,7.65
USB_P_N: DD1.13 VD1.6 | length 18.7
  Top Layer w0.381: v1(47.775,17.525) 47.794,17.544 49.081,17.544 DD1.13@49.1,17.563 ; v1(56.1,9.925) 57.165,9.925 VD1.6@57.165,9.917
  Bottom Layer w0.381: v1@47.687,17.482 ccw(c48.499,16.076) 46.875,16.076 46.875,11.51 ccw(c47.825,11.51) 47.825,10.56 53.184,10.56 55.176,10.555 ; 55.177,10.555 cw(c55.175,9.925) 55.605,10.386 v1(56.1,9.925)
USB_P_P: DD1.14 VD1.4 | length 21.7
  Top Layer w0.381: v1(47.75,18.55) 47.809,18.55 47.854,18.595 48.862,18.595 DD1.14@49.1,18.833 ; v1(55.175,9.925) cw(c56.167,9.925) 56.167,10.917 VD1.4@57.165,10.917
  Bottom Layer w0.381: v1@47.827,18.541 ccw(c48.651,16.276) 46.24,16.276 46.24,11.247 ccw(c47.562,11.247) 47.562,9.925 v1(55.175,9.925)
VBUS: VD1.5 XP1.2 XP1.11 | length 14.3
  Top Layer w0.2: VD1.5@57.165,10.417 57.199,10.383 57.717,10.383 57.916,10.184 XP1.11@57.916,7.394
  Top Layer w0.381: 58.05,7.772 58.05,4.95 58.3,4.7 62.627,4.7 62.85,4.923 62.85,7.766
Vfb=0,6: R28.1 R34.2 R35.2 U7.3 | length 6.3
  Top Layer w0.2: R28.1@60.183,47.442 60.426,47.042 60.829,46.453 60.842,46.439 60.85,46.431 60.859,46.424 61.42,45.981 R35.2@61.745,45.642 ; R34.2@61.745,43.842 R35.2@61.745,45.642 ; U7.3@63.585,45.992 63.585,45.838 63.389,45.642 R35.2@61.745,45.642
Vfb=0.6: R29.1 R36.2 U6.3 | length 3.8
  Top Layer w0.3: R29.1@17.997,17.244 R36.2@20.027,17.244 ; U6.3@19.975,19.017 19.977,19.017 R36.2@19.977,17.239
VIN_ISO: C27.1 C28.1 R31.2 R32.2 U4.3 U5.4 VT5.S VT6.S X10.2 | length 94
  Bottom Layer w1: 29.525,25.525 29.525,29.425 33.915,33.815 33.915,47.6
  Bottom Layer w1.5: C27.1@51.055,41.4 51.373,41.4 51.373,38.475 X10.2@51.373,35.249
  Bottom Layer w2: U5.4@5.5,39.725 13.375,47.6 33.915,47.6 51.055,47.6 ; C27.1@51.055,41.4 51.055,47.6 ; 57.65,45.6 57.65,47.6 51.055,47.6
  other v1: 29.25,24.65 29.85,24.65 29.25,25.25 29.85,25.25 57.325,45.275 57.975,45.275 57.975,45.925
VLCD: C26.1 U3.4 VD2.1 VD4.1 X5.1 X6.1 XS1.1 | length 66.6
  Top Layer w2: XS1.1@13.275,32.425 13.275,31.147 14.447,29.975 C26.1@21.025,29.975 23.175,29.975 25.417,32.217 34.167,32.217 U3.4@37.925,35.975
  Bottom Layer w0.5: VD4.1@7.496,23.522 VD4.1@7.549,23.575
  Bottom Layer w0.6: 4.098,22.322 7.145,22.322 7.496,22.673 7.496,23.522 7.446,23.472 X6.1@5.527,23.472 ; X5.1@5.527,17.322 7.446,17.322 VD2.1@7.549,17.425 7.549,16.576 7.198,16.225 4.151,16.225 3.8,16.576 3.8,29.699 4.151,30.05 11.8,30.05 12.725,30.975 12.784,30.975 13.275,31.466 XS1.1@13.275,32.425
xBUTTON_A: DD1.39 R18.2 | length 2.7
  Top Layer w0.3: R18.2@29.6,5.475 29.625,5.475 30.386,4.714 30.386,4.483 31.275,3.593 DD1.39@31.425,3.593
xBUTTON_AA: DD3.1 X7.2 | length 73.6
  Top Layer w0.2: DD3.1@13.471,95.984 13.471,98.721 14.15,99.4 78.125,99.4 78.65,98.875 X7.2@78.65,93.675
xBUTTON_B: DD1.38 R17.2 | length 2.6
  Top Layer w0.3: R17.2@29.6,6.45 29.625,6.45 30.958,5.117 31.322,5.117 DD1.38@31.575,4.863
xBUTTON_BB: DD2.1 X7.3 | length 37.9
  Top Layer w0.2: DD2.1@46.821,95.934 46.821,96.184 49.697,99.06 77.69,99.06 78.15,98.6 X7.3@78.15,93.675
xBUTTON_C: DD1.34 R15.2 | length 6.3
  Top Layer w0.2: R15.2@29.6,7.425 29.625,7.425 29.8,7.6 29.8,7.625 30.013,7.838 32.481,7.838 32.729,8.086 32.729,9.763 32.612,9.88 31.638,9.88 DD1.34@31.572,9.946
xBUTTON_CC: DD5.1 X7.4 | length 34.8
  Top Layer w0.2: DD5.1@55,94.025 53.75,94.025 53.375,94.4 53.375,97.953 54.142,98.72 77.33,98.72 77.65,98.4 X7.4@77.65,93.675
xBUTTON_D: DD1.35 R16.2 | length 2.1
  Top Layer w0.2: R16.2@29.6,8.375 29.775,8.55 29.912,8.55 29.917,8.555 31.455,8.555 DD1.35@31.575,8.675
xBUTTON_DD: DD4.1 X7.5 | length 13.8
  Top Layer w0.2: X7.5@77.15,93.675 77.15,92.042 77.267,91.925 85.975,91.925 88.1,94.05 DD4.1@88.35,94.05
xCLIPPING: R9.2 X2.8 | length 62.7
  Top Layer w0.2: R9.2@50.376,23.55 55.796,23.55 60.111,27.865 88.146,27.865 91.1,24.912 91.1,16.889 94.275,13.714 94.275,9.697 93.364,8.786 93.167,8.339 ccw(c93.35,8.258) 93.151,8.282 93.15,8.27 X2.8@93.15,7.65
pads on no net: DD2.4 DD2.6 DD3.4 DD3.6 DD4.4 DD4.6 DD5.4 DD5.6 DD9.2 DD10.2 DD10.6 DD10.8 DD10.9 DD10.10 DD10.11 DD10.12 DD10.16 DD10.17 DD10.18 DD10.19 DD10.20 DD10.22 DD10.25 DD10.26 DD10.27 DD10.28 DD10.29 DD10.30 DD10.31 DD10.32 DD10.34 DD10.35 DD10.36 DD10.37 DD10.39 DD10.40 DD10.41 DD10.42 DD10.43 DD10.48 DD10.49 DD10.50 DD10.51 DD10.52 DD10.53 DD10.54 U2.3 U2.8 U6.2 U6.6 U7.6 X1.8 X1.9 X1.10 X1.11 X1.12 X1.13 X1.14 X5.2 X6.2 XP1.3 XP1.4 XP1.9 XP1.10

## Polygon pours and split planes (outlines as drawn)
GND_SENS on Bottom Layer "NONET_L-01_P-001" (solid, remove dead copper, pour order 42): 100,100 100,87 0,87 0,100
GND_ISO on Bottom Layer "NONET_L-01_P-001" (solid, remove dead copper, pour order 21): 11.075,15.216 12.275,16.416 12.275,24.55 15.1,27.375 26.27,27.375 28.02,29.125 36.072,29.125 40.575,33.628 40.575,46.5 57.675,46.5 57.675,50.55 70.975,50.55 70.975,41.225 68.875,39.125 56.1,39.125 55.425,38.45 55.425,29.475 100.025,29.475 100.025,27.625 100.025,0 0.025,0 0.025,27.375 2.6,27.375 2.6,15.216
GND on Bottom Layer "NONET_L-01_P-001" (solid, remove dead copper, pour order 18): 100,41.7 100,29.8 60.525,29.8 60.525,38.175 72.325,38.175 75.85,41.7
LCD_GND on Bottom Layer "NONET_L-01_P-001" (solid, remove dead copper, pour order 40): 8.025,37.525 31.425,37.525 31.425,35.325 25.05,28.95 15.2,28.95 11.625,25.375 11.625,16.7 10.825,15.9 8.475,15.9 8.475,26.2 5.25,26.2 5.25,36.125
AC_L_SYS on Bottom Layer "NONET_L-01_P-001" (solid, pour order 29): 61.575,56.908 64.075,56.908 64.075,60.6 66.375,62.9 76.08,62.875 84.05,70.845 97.175,70.845 97.175,82.5 94.1,82.5 94.1,76.675 73.32,76.675 67.845,82.15 64.725,82.15 64.725,77.725 56.1,77.725 51.325,82.5 49.175,82.5 49.175,74.2 70.7,74.2 72.042,72.858 72.042,67.375 63.875,67.375 61.575,65.075
AC_L on Bottom Layer "NONET_L-01_P-001" (solid, pour order 28): 34,72.35 69.4,72.35 70.07,71.68 70.07,68.675 49.375,68.675 43.475,62.775 7.125,62.775 7.125,73.775 11.025,77.675 11.025,82.1 15.75,82.1 15.75,76.975 13.075,74.3 13.075,70.35 32,70.35
GND_SENS on Top Layer "NONET_L-01_P-001" (solid, remove dead copper, pour order 41): 100,100 100,86.975 0,86.975 0,100
AC_N on Top Layer "NONET_L-01_P-001" (solid, pour order 26): 31.5,82.45 31.5,75.1 51.125,75.1 58.475,82.45 60.375,82.45 60.375,68.4 73.3,68.4 73.3,82.45 77.95,82.45 77.95,62.8 16.225,62.8 16.225,75.1 20.25,79.125 20.25,82.45
GND_ISO on Top Layer "NONET_L-01_P-001" (solid, remove dead copper, pour order 19): 13.675,26.025 15.1,27.425 26.25,27.425 27.95,29.125 36.125,29.125 40.6,33.6 40.6,38.45 24.8,38.45 22.2,38.45 22.2,48.525 57.675,48.525 57.675,53.125 61.275,53.125 61.275,50.375 66.273,50.375 66.273,39.125 56.125,39.125 51.525,34.525 51.525,26.55 56.15,26.55 59.125,29.525 100.025,29.525 100.025,0 0.025,0 0,27.425 2.575,27.425 2.575,25.975
GND on Top Layer "NONET_L-01_P-001" (solid, remove dead copper, pour order 20): 100,41.725 100,29.8 59.275,29.8 59.275,37.075 71.2,37.075 75.85,41.725
LCD_GND on Top Layer "NONET_L-01_P-001" (solid, remove dead copper, pour order 34): 8.125,37.525 31.425,37.525 31.425,31.125 17.375,31.125 12.45,26.2 8.475,26.2 5.25,26.2 5.25,36.2
NetC40_1 on Top Layer "NONET_L-01_P-001" (solid, remove dead copper, pour order 39): 69.955,40.937 ccw(c69.955,41.512) 70.53,41.512 70.53,43.812 ccw(c70.105,43.812) 70.105,44.237 67.43,44.237 ccw(c67.43,43.737) 66.93,43.737 66.93,43.587 cw(c65.43,43.587) 65.43,42.087 61.83,42.087 ccw(c61.83,41.987) 61.73,41.987 61.73,41.037 ccw(c61.83,41.037) 61.83,40.937

## Keep-outs
Top Layer:
  circle w0.01: c20,93.5 r4
  circle w0.01: c5,80 r4
  lines w0.01: 20.031,5.132 cw(c18.5,8.5) 21.763,6.756 ; 91.507,21.05 ccw(c95,23) 98.657,21.38 ; 91.507,24.95 cw(c95,23) 98.684,24.558
Bottom Layer:
  circle w0.01: c20,93.5 r4
  circle w0.01: c18.5,8.5 r3.7
  circle w0.01: c95,23 r4
  circle w0.01: c5,80 r4

## Other copper
Top Layer:
  pour cut-out: 62.325,98.55 62.325,98.005 ccw(c62.522,98.005) 62.522,97.808
  region net VIN_ISO: 58.275,46.625 cw(c58.275,46.575) 58.325,46.575 58.325,44.35 cw(c58.3,44.35) 58.3,44.325 56.85,44.325 cw(c56.85,44.4) 56.775,44.4 56.775,46.575 cw(c56.825,46.575) 56.825,46.625
  region net 12V0: 59.35,36.25 cw(c59.35,35.95) 59.65,35.95 59.65,35.3 cw(c59.35,35.3) 59.35,35 58.7,35 cw(c58.7,35.3) 58.4,35.3 58.4,35.975 cw(c58.675,35.975) 58.675,36.25
  region net VIN_ISO: 28.014,25.246 cw(c28.334,25.246) 28.334,25.565 29.839,25.565 cw(c29.839,25.246) 30.159,25.246 30.159,23.352 30.159,22.418 cw(c30.106,22.418) 30.106,22.365 28.049,22.365 cw(c28.049,22.399) 28.014,22.4
  region net 3V3: 53.85,7.275 53.85,7.9 ccw(c53.55,7.9) 53.55,8.2 ccw(c53.55,7.898) 53.337,8.112 52.725,7.5 ccw(c52.947,7.267) 52.625,7.275 ccw(c52.925,7.275) 52.925,6.975 53.55,6.975 ccw(c53.55,7.275)
  region net NetL1_2: 65.183,45.867 65.183,47.117 cw(c65.583,47.117) 65.583,47.517 67.058,47.517 ccw(c67.058,48.467) 68.008,48.467 68.008,49.692 cw(c68.283,49.692) 68.283,49.967 70.283,49.967 cw(c70.283,49.692) 70.558,49.692 70.558,45.967 cw(c70.083,45.967) 70.083,45.492 65.346,45.492 cw(c65.346,45.655) 65.182,45.655
  pour cut-out: 65.03,45.762 65.03,44.424 cw(c64.583,44.424) 64.583,43.977 64.58,43.977 ccw(c64.605,43.887) 64.605,43.862 65.18,43.862 65.18,45.762
  region net 5V0_ISO: 14.3,11.528 14.925,11.528 ccw(c14.925,11.828) 15.225,11.828 15.225,12.428 ccw(c14.9,12.428) 14.9,12.753 14.325,12.753 ccw(c14.325,12.428) 14,12.428 14,11.828 ccw(c14.3,11.828)
  region net 5V0_ISO: 14.025,22.85 15.25,22.85 15.25,15.75 cw(c14.95,15.75) 14.95,15.45 14.35,15.45 cw(c14.35,15.775) 14.025,15.775
  pour cut-out: 15.85,26.44 ccw(c15.05,26.44) 15.05,27.24 15.05,27.54 ccw(c15.15,27.54) 15.15,27.44 25.075,27.44 cw(c25.075,26.74) 25.775,26.74 25.775,25.865 ccw(c26,25.865) 26,25.64 26.25,25.64 26.25,22.015 cw(c26.075,22.015) 26.075,21.84 24.5,21.84 ccw(c24.5,21.19) 23.85,21.19 cw(c23.125,21.19) 23.125,20.465 18.825,20.465 cw(c18.825,20.99) 18.3,20.99 18.3,22.49 ccw(c17.5,22.49) 17.5,23.29 16.275,23.29 cw(c16.275,23.715) 15.85,23.715
  region net NetC32_1: 27.759,23.717 27.759,21.642 cw(c27.732,21.642) 27.732,21.615 25.775,21.615 ccw(c25.775,20.865) 25.025,20.865 25.025,20.09 cw(c25,20.09) 25,20.065 23.884,20.065 23.884,21.256 ccw(c22.775,21.256) 22.775,22.365 22.2,22.365 cw(c22.2,22.84) 21.725,22.84 21.725,25.49 cw(c22.2,25.49) 22.2,25.965 23.225,25.965 cw(c23.225,25.465) 23.725,25.465 23.725,24.665 ccw(c24.45,24.665) 24.45,23.94 27.725,23.94 cw(c27.725,23.901) 27.764,23.901
  region net NetL2_2: 20.1,20.615 18.85,20.615 cw(c18.85,21.015) 18.45,21.015 18.45,22.49 ccw(c17.5,22.49) 17.5,23.44 16.275,23.44 cw(c16.275,23.715) 16,23.715 16,25.715 cw(c16.275,25.715) 16.275,25.99 20,25.99 cw(c20,25.515) 20.475,25.515 20.475,20.777 cw(c20.311,20.777) 20.311,20.614
  pour cut-out: 57.275,46.475 56.1,46.475 55.75,46.125 55.75,46.725 57.175,46.725
  pour cut-out: 65,40.709 61.875,40.709 61.875,40.591 65,40.591
  pour cut-out: 51.25,5.075 51.25,5.675 50.775,5.675 50.775,4.125 51.25,4.125
  pour cut-out: 66.625,17.207 66.625,19.2 65.5,19.2 65.5,17.207
  pour cut-out: 66.925,21.55 66.925,22.3 66.875,22.3 66.875,21.575
  pour cut-out: 70.625,21.99 71.073,21.99 71.073,21.857 70.625,21.857
  pour cut-out: 82.05,13.5 82.95,13.5 82.95,12.875 83.025,12.875 83.025,13.6 82.05,13.6
  pour cut-out: 84.15,6.65 84.15,4.875 83.95,4.875 83.95,6.65
  pour cut-out: 93.717,4.061 94.192,4.061 94.192,3.611 94.392,3.611 94.392,4.236 93.717,4.236 93.717,4.086
  pour cut-out: 13.5,16.625 13.5,22.8 13.5,23.05 15.4,23.015 15.4,16.625
  pour cut-out: 25.872,16.622 25.872,21.54 24.379,21.54 24.379,16.622
Bottom Layer:
  region net VIN_ISO: 57.975,46.225 cw(c57.975,45.925) 58.275,45.925 58.275,45.275 cw(c57.975,45.275) 57.975,44.975 57.325,44.975 cw(c57.325,45.275) 57.025,45.275 57.025,45.95 cw(c57.3,45.95) 57.3,46.225
  region net 12V0: 59.35,36.25 cw(c59.35,35.95) 59.65,35.95 59.65,35.3 cw(c59.35,35.3) 59.35,35 58.7,35 cw(c58.7,35.3) 58.4,35.3 58.4,35.975 cw(c58.675,35.975) 58.675,36.25
  region net VIN_ISO: 29.225,24.328 29.85,24.328 ccw(c29.85,24.628) 30.15,24.628 30.15,25.228 ccw(c29.825,25.228) 29.825,25.553 29.25,25.553 ccw(c29.25,25.228) 28.925,25.228 28.925,24.628 ccw(c29.225,24.628)
  region net 3V3: 52.925,8.2 53.55,8.2 cw(c53.55,7.9) 53.85,7.9 53.85,7.275 cw(c53.55,7.275) 53.55,6.975 52.925,6.975 cw(c52.925,7.275) 52.625,7.275 52.625,7.9 cw(c52.925,7.9)
  pour cut-out: 40.575,20.3 40.575,19.875 ccw(c41.075,19.875) 41.075,19.375 42.225,19.375 cw(c42.225,18.925) 42.675,18.925 40.175,18.925 40.175,20.3
  pour cut-out: 29.886,9.511 29.886,10.411 ccw(c29.561,10.411) 29.561,10.736 29.136,10.736 29.136,10.811 30.086,10.811 30.086,9.511
  region net 5V0_ISO: 14.3,11.528 14.925,11.528 ccw(c14.925,11.828) 15.225,11.828 15.225,12.428 ccw(c14.9,12.428) 14.9,12.753 14.325,12.753 ccw(c14.325,12.428) 14,12.428 14,11.828 ccw(c14.3,11.828)
  region net 5V0_ISO: 14.325,16.675 14.537,16.587 15.172,15.952 15.25,15.775 cw(c14.925,15.775) 14.925,15.45 14.35,15.45 cw(c14.35,15.775) 14.025,15.775 14.025,16.375 cw(c14.325,16.375)
  pour cut-out: 45.7,29.125 45.1,29.125 45.1,29.425 45.7,29.425
  region net 3V3: 49.225,35.675 49.225,33.775 51.95,33.775 51.95,29.275 48.775,29.275 48.775,36.104
  region net 3V3: 48.325,35.675 48.325,33.775 45.6,33.775 45.6,29.275 48.775,29.275 48.775,36.104

## Silkscreen, mask and mechanical layers (free items; w line width, h text height)
Top Overlay:
  region: 316 vertices and 0 holes, not listed, extent 69.823,22.557 90.825,30.952
  text "'.Product_Name''.Project_ID'.v'.Project_Version'" at 76.446,20.809 h2
  text "DISPLAY" at 8.995,17.569 h1.25 r90
  text "ADAU / BOARD" at 93.191,8.838 h1.25
  text "ADR_L" at 10.279,7.01 h1.25
  text "DALAS" at 22.795,6.593 h1.25
  text "SENSORS" at 8.674,4.541 h1.25 r90
Bottom Overlay:
  text "POWER_ADAU" at 97.6,42.391 h1.25
  text "FAN_B" at 5.719,28.435 h1.25
  text "FAN_A" at 5.743,13.986 h1.25
  text "'.Product_Name''.Project_ID'.v'.Project_Version'" at 48.55,4.201 h2.5
Bottom Solder:
  lines w1: 13.59,80.88 14.3,80.17 14.3,78.002 11.5,75.202 11.5,68.775 12.925,67.35 34.45,67.35 38.15,71.05 68.474,71.05 68.675,70.849 ; 62.5,56.95 62.825,57.275 62.825,62.925 64.925,65.025 74.2,65.025 74.925,65.75 74.925,72.5 66.825,80.6 66.325,80.6
Board:
  lines w0.02: 24.99,85.01 8,85.01 cw(c8,85.76) 8,86.51 24.99,86.51 ; 25,85 ccw(c25,85.75) 25,86.5 ; 76,86.5 ccw(c76,85.75) 76,85 91.99,85 ; 76.01,86.51 92,86.51 cw(c92,85.76) 92,85.01 ; 0,3 ccw(c3,3) 3,0 97,0 ccw(c97,3) 100,3 100,82 ccw(c97,82) 97,85 cw(c97,85.75) 97,86.5 ccw(c97,89.5) 100,89.5 100,97 ccw(c97,97) 97,100 3,100 ccw(c3,97) 0,97 0,89.5 ccw(c3,89.5) 3,86.5 cw(c3,85.75) 3,85 ccw(c3,82) 0,82 0,3 ; 30,85 cw(c30,85.75) 30,86.5 50,86.5 cw(c50,85.75) 50,85 30,85 ; 55,85 cw(c55,85.75) 55,86.5 71,86.5 cw(c71,85.75) 71,85 55,85
Top Assembly:
  circle w0.254: c-0.025,93.5 r10
  circle w0.254: c33.35,93.2 r10
  circle w0.254: c66.675,93.25 r10
  circle w0.254: c99.95,93.25 r10
  lines w0.1: 60.05,51.225 60.05,53.025 64.3,53.025 64.3,51.225 60.05,51.225
Title: